# EAGLE board DualSerialHBridge-bad (EAGLE 6.4)

Size 50.8 x 34.29 mm. Coordinates in mm from the lower left corner, seen from the top.
Outline: 0,34.29 0,0 50.8,0 50.8,34.29 0,34.29
Copper layers (1*16): Top 0.0356mm / dielectric 1.5011mm / Bottom 0.0356mm
Design rules "LaenPCBOrder": minimum track width 6mil, minimum drill 13mil, track to track 6mil, track to pad 6mil, pad to pad 6mil, via to via 6mil, smd to smd 6mil, copper to edge 15mil, drill to drill 6mil, minimum pad ring 7mil, minimum via ring 7mil, stop-mask expansion 4mil, vias tented up to drill 0mil, thermal gap 10mil

## Footprints (pad centres in the part's own frame; a part is rotated, then mirrored left to right if it is on the bottom)
DIL16 = drill 0.813 long: 1 -8.89,-3.81; 2 -6.35,-3.81; 3 -3.81,-3.81; 4 -1.27,-3.81; 5 1.27,-3.81; 6 3.81,-3.81; 7 6.35,-3.81; 8 8.89,-3.81; 9 8.89,3.81; 10 6.35,3.81; 11 3.81,3.81; 12 1.27,3.81; 13 -1.27,3.81; 14 -3.81,3.81; 15 -6.35,3.81; 16 -8.89,3.81
DIL14 = drill 0.813 long: 1 -7.62,-3.81; 2 -5.08,-3.81; 3 -2.54,-3.81; 4 0,-3.81; 5 2.54,-3.81; 6 5.08,-3.81; 7 7.62,-3.81; 8 7.62,3.81; 9 5.08,3.81; 10 2.54,3.81; 11 0,3.81; 12 -2.54,3.81; 13 -5.08,3.81; 14 -7.62,3.81
1,6/0,8 = drill 0.813 pad 1.6 octagon: 1 0,0
TO220V = drill 1.016 long: 1 -2.54,-2.54; 2 0,-2.54; 3 2.54,-2.54
SIP-10 = drill 0.8 pad 1.27 long: 1 -11.43,0; 2 -8.89,0; 3 -6.35,0; 4 -3.81,0; 5 -1.27,0; 6 1.27,0; 7 3.81,0; 8 6.35,0; 9 8.89,0; 10 11.43,0
2,8 = hole 2.8: 0,0
R-5 = drill 0.813 pad 1.6 octagon: 1 -2.54,0; 2 2.54,0

## Placement (x,y rotation side)
74HC595  74HC595  [DIL16]  8.13,14.48 270 top
E$1  LM324  [DIL14]  21.59,20.57 270 top
E$2  [1,6/0,8]  40.13,9.4 270 top
E$3  [1,6/0,8]  12.95,31.75 0 top
E$4  [1,6/0,8]  15.49,31.75 0 top
E$5  [1,6/0,8]  18.03,31.75 0 top
E$6  [1,6/0,8]  20.57,31.75 0 top
E$7  [1,6/0,8]  31.5,31.75 0 top
E$8  [1,6/0,8]  34.04,31.75 0 top
E$9  [1,6/0,8]  36.58,31.75 0 top
E$10  [1,6/0,8]  39.12,31.75 0 top
E$11  [1,6/0,8]  41.66,31.75 90 top
E$12  [1,6/0,8]  40.13,6.86 270 top
E$13  [TO220V]  42.16,16.26 0 top
E$14  [TO220V]  42.16,20.7 0 top
E$15  [TO220V]  42.16,25.15 0 top
E$16  [TO220V]  42.16,29.59 0 top
E$17  [1,6/0,8]  48.51,19.81 0 top
E$18  [1,6/0,8]  48.51,28.19 0 top
E$19  [1,6/0,8]  48.51,25.65 0 top
E$20  [1,6/0,8]  48.51,23.11 0 top
E$21  [1,6/0,8]  48.51,30.73 0 top
E$22  LM324  [DIL14]  28.45,6.35 0 top
E$24  [SIP-10]  14.73,15.75 270 top
E$25  [1,6/0,8]  48.51,17.27 0 top
E$26  [1,6/0,8]  1.78,20.83 0 top
E$27  [1,6/0,8]  1.78,18.29 0 top
E$28  [1,6/0,8]  1.78,15.75 0 top
E$29  [TO220V]  31.24,16.26 0 top
E$30  [TO220V]  31.24,20.7 0 top
E$31  [TO220V]  31.24,25.15 0 top
E$32  [TO220V]  31.24,29.59 0 top
E$33  [1,6/0,8]  1.78,23.37 0 top
E$34  [1,6/0,8]  1.78,10.67 0 top
E$35  [1,6/0,8]  1.78,8.13 0 top
E$36  [1,6/0,8]  1.78,5.59 0 top
E$37  [1,6/0,8]  1.78,13.21 0 top
E$38  [1,6/0,8]  40.13,1.78 270 top
E$39  [1,6/0,8]  40.13,4.32 270 top
E$40  [2,8]  5.08,29.21 0 top
E$42  [2,8]  45.72,5.08 0 top
E$44  [R-5]  48.51,11.94 270 top
GND  [1,6/0,8]  10.41,31.75 0 top

## Library data of the parts
74HC595 = 74xx-us
E$1 E$22 = 40xx
E$2-E$12 E$17-E$21 E$25-E$28 E$33-E$39 GND = wirepad
E$13-E$16 E$29-E$32 = transistor-pnp
E$24 = linear
E$40 E$42 = holes
E$44 = discrete

## Nets
S$1: E$1.1 E$32.1
S$2: 74HC595.10 74HC595.16 E$6.1 E$11.1
S$3: 74HC595.11 E$3.1 E$8.1
S$4: 74HC595.12 E$4.1 E$9.1
S$5: 74HC595.14 E$5.1
S$6: E$1.4 E$12.1 E$22.4 E$29.2 E$30.2 E$31.2 E$32.2 E$38.1
S$7: E$1.7 E$16.1
S$8: E$1.8 E$31.1
S$9: E$1.14 E$15.1
S$10: E$22.1 E$30.1
S$11: 74HC595.15 E$1.3 E$1.6 E$24.9 E$33.1
S$12: 74HC595.8 74HC595.13 E$1.11 E$2.1 E$7.1 E$22.11 E$24.10 E$25.1 E$39.1 E$44.2 GND.1
S$13: E$14.1 E$22.7
S$14: E$22.8 E$29.1
S$15: E$13.1 E$22.14
S$16: 74HC595.1 E$1.2 E$1.5 E$24.8 E$26.1
S$17: 74HC595.2 E$1.10 E$1.13 E$24.7 E$27.1
S$18: 74HC595.3 E$1.9 E$1.12 E$24.6 E$28.1
S$19: 74HC595.4 E$22.3 E$22.6 E$24.5 E$37.1
S$20: 74HC595.5 E$22.2 E$22.5 E$24.4 E$34.1
S$21: 74HC595.6 E$22.10 E$22.13 E$24.3 E$35.1
S$22: 74HC595.9 E$10.1
S$23: 74HC595.7 E$22.9 E$22.12 E$24.2 E$36.1
S$24: E$13.3 E$14.3 E$15.3 E$16.3 E$17.1 E$44.1
S$25: E$16.2 E$21.1 E$32.3
S$26: E$15.2 E$18.1 E$31.3
S$27: E$14.2 E$19.1 E$30.3
S$28: E$13.2 E$20.1 E$29.3

## Tracks (layer width: path | path; a pad name or v marks a point on that pad's centre or on a via)
S$1  (1 unrouted)
S$2  (3 unrouted)
S$3  (2 unrouted)
S$4  (2 unrouted)
S$5  (1 unrouted)
S$6  (7 unrouted)
S$7  (1 unrouted)
S$8  (1 unrouted)
S$9  (1 unrouted)
S$10  (1 unrouted)
S$11  (4 unrouted)
S$12  (10 unrouted)
S$13  (1 unrouted)
S$14  (1 unrouted)
S$15  (1 unrouted)
S$16  (4 unrouted)
S$17  (4 unrouted)
S$18  (4 unrouted)
S$19  (4 unrouted)
S$20  (4 unrouted)
S$21  (4 unrouted)
S$22  (1 unrouted)
S$23  (4 unrouted)
S$24  (5 unrouted)
S$25  (2 unrouted)
S$26  (2 unrouted)
S$27  (2 unrouted)
S$28  (2 unrouted)

## Text on the board
tNames: Serial In | Serial Out | REF | GND | SHCP | STCP | DSI | VCC | GND | SHCP | STCP | DSO | VCC | O1 | O2 | O3 | Power Out | H1 | O4 | L1 | H2 | S | Sense Out | L2 | H3 | Power | Shunt | L3 | GND | H4 | VDD | L4 | 1 | Parallel In | GND | Dual Parallel/Serial H-Bridge | Brent M. Spell | VDD